# Altium PCB Power.PcbDoc
Units mil, origin at the board's own origin, x right, y up, seen from the top; angles counter-clockwise.
Board outline 1171.26 x 3031.5 mil, 2 copper layers (Top Layer, Bottom Layer); 73 components, 43 nets, 210 pads, 41 vias.
Unrouted connection lines stored in the file: 33.
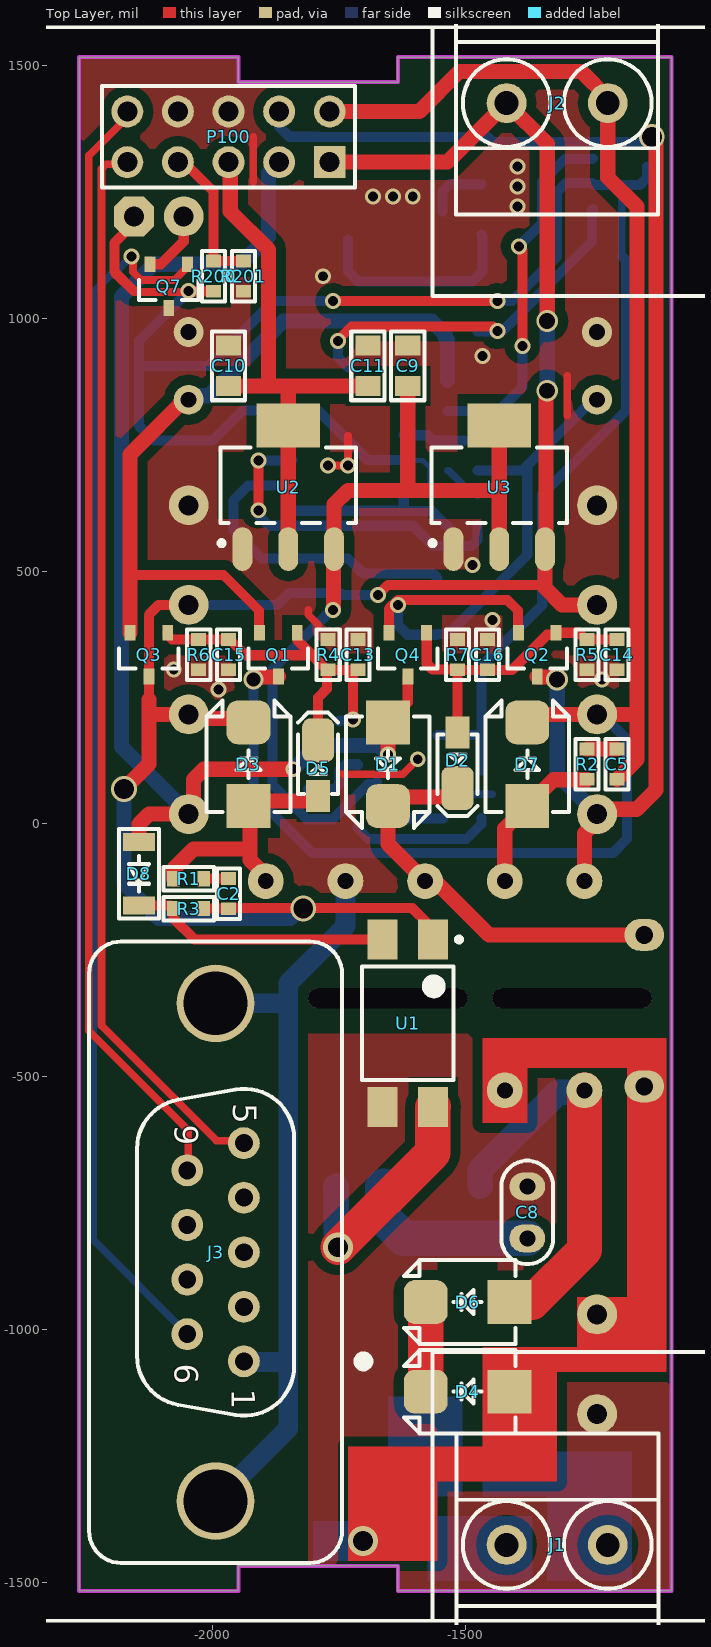
[diagram p0: Top Layer view]
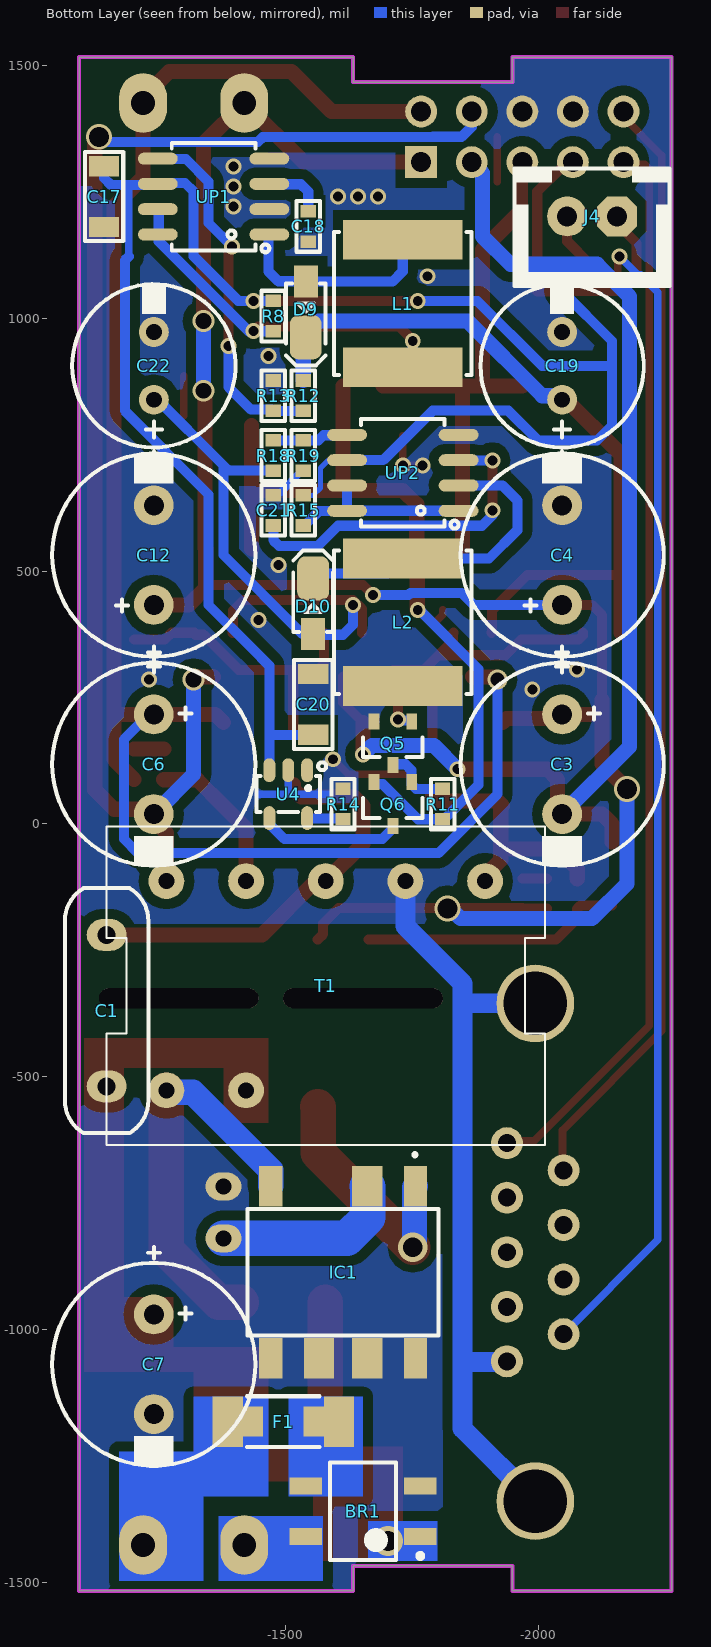
[diagram p1: Bottom Layer view, seen from below]
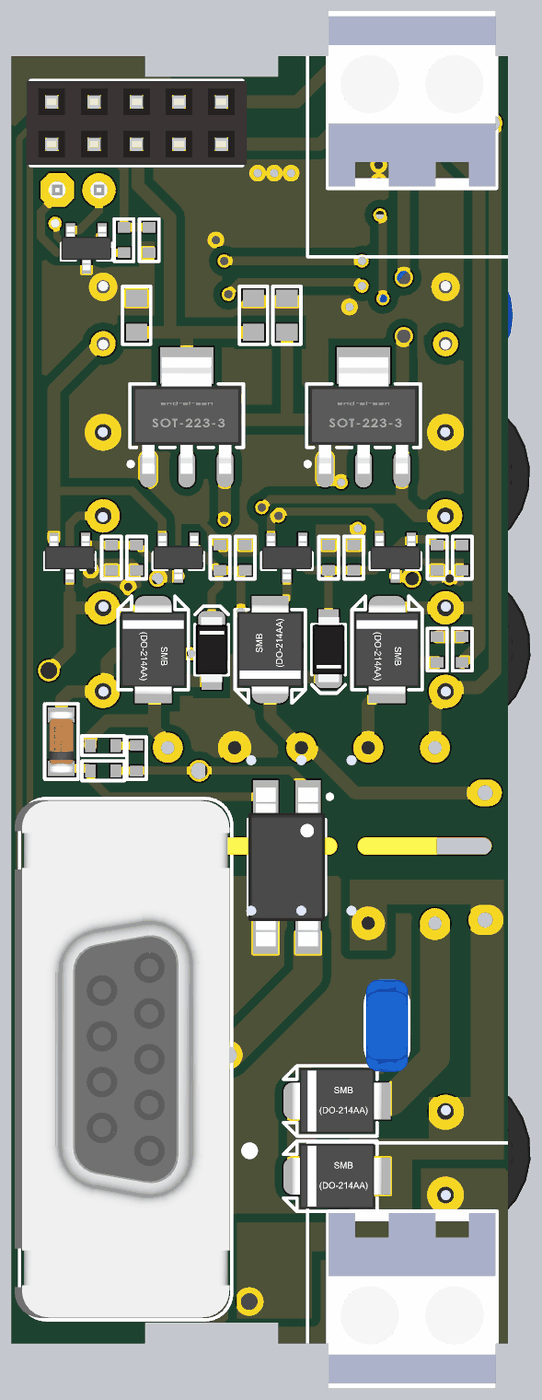
[diagram p2: 3D render of the assembled board from above, using the file's embedded part models]
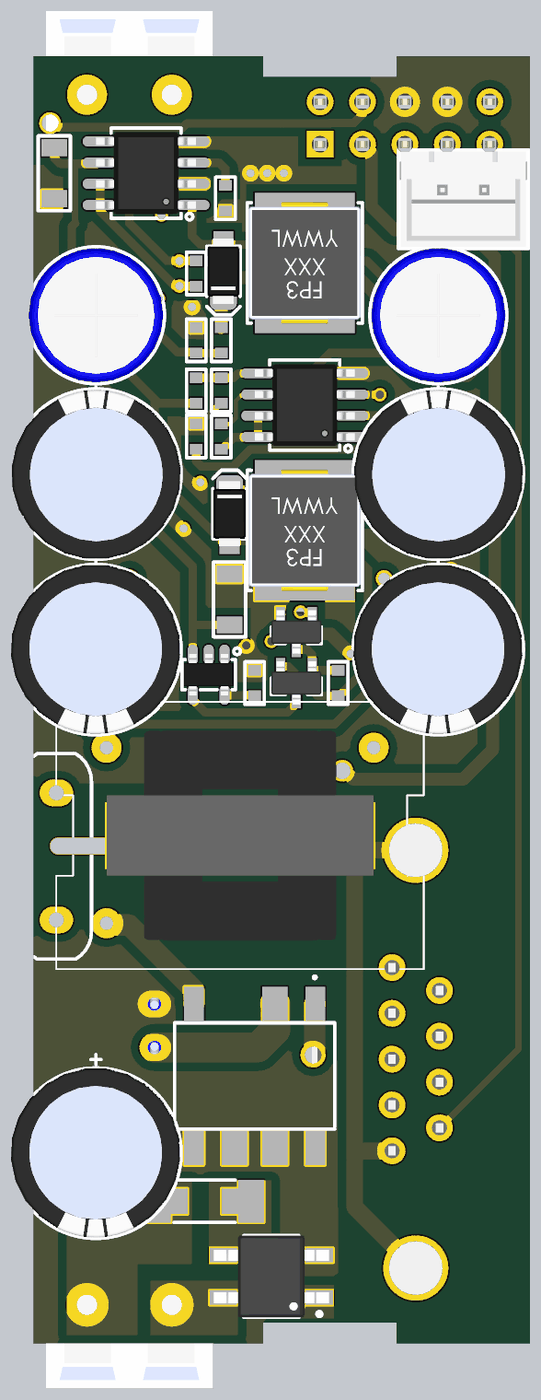
[diagram p3: 3D render of the assembled board from below, using the file's embedded part models]

## Layer stack, top to bottom
Top Solder: solder mask 0.4, Solder Resist, Dk 3.5
Top Layer: signal copper 1.4
Dielectric 1: dielectric 12.6, FR-4, Dk 4.8
Bottom Layer: signal copper 1.4
Bottom Solder: solder mask 0.4, Solder Resist, Dk 3.5

## Board outline
-2263.78,-1515.75 -2263.78,1515.75 -1948.82,1515.75 -1948.82,1466.54 -1633.86,1466.54 -1633.86,1515.75 -1092.52,1515.75 -1092.52,-1515.75 -1633.86,-1515.75 -1633.86,-1466.54 -1948.82,-1466.54 -1948.82,-1515.75

## Design rules (kind name [scope] priority, off if disabled: settings)
Clearance [All] p1: gap=7.87 ignorepadtopadclearanceinfootprint=FALSE except(20: Arc-Poly Track-Poly SMDPad-Poly THPad-Poly Via-Poly Fill-Poly Poly-Poly)
DiffPairsRouting [All] p1: maxlimit=10 minlimit=10 mostfreqgap=10 toplayer_minwidth=15 toplayer_maxwidth=15 toplayer_prefwidth=15 bottomlayer_minwidth=15 bottomlayer_maxwidth=15 bottomlayer_prefwidth=15 maxuncoupledlength=500
PolygonConnect [All] p1: connectstyle=Direct reliefconductorwidth=10 reliefentries=4 polygonreliefangle="90 Angle" airgapwidth=10
RoutingVias [All] p1: holewidth=28 width=50 viastyle="Through Hole" minholewidth=28 minwidth=50 maxholewidth=28 maxwidth=50
SolderMaskExpansion [All] p1: expansion=4
Width [All] p1: maxlimit=100 minlimit=10 preferedwidth=20
29 further rules are at their usual default settings.

## Classes and differential pairs
component class battery: C17 C18 C19 C20 C21 C22 D9 D10 J4 L1 L2 Q5 Q6 Q7 R8 R11 R12 R13 R14 R15 R18 R19 R200 R201 U4 UP1 UP2
component class Power: BR1 C1 C2 C3 C4 C5 C6 C7 C8 C9 C10 C11 C12 C13 C14 C15 C16 D1 D2 D3 D4 D5 D6 D7 D8 F1 IC1 IC2 J1 J2 J3 P100 Q1 Q2 Q3 Q4 R1 R2 R3 R4 R5 R6 R7 T1 U1 U2 U3
differential pair RS485: +RS485_P -RS485_N

## Components (designator, comment, footprint, x,y, rotation, side; value= is the part's Value field where it differs from the comment)
BR1 "Bridge" SOP254P690X270-4L -1653.54,-1358.27 r0 bottom
C1 "68pF" C_CER_D12 -1146.85,-368.9 r90 bottom
C2 "560pF" "CAP 0603 560p" -1968.5,-137.8 r270 top
C3 "1000uF" C_EL_10X12 -2047.24,118.11 r270 bottom
C4 "1000uF" C_EL_10X12 -2047.24,531.5 r90 bottom
C5 "560pF" "CAP 0603 560p" -1200.79,118.11 r270 top
C6 "1000uF" C_EL_10X12 -1240.16,118.11 r270 bottom
C7 "10uF" C_EL_10X12 -1240.16,-1067.9 r270 bottom
C8 "10uF" C_CER_M5 -1377.95,-767.72 r90 top
C9 "10uF" "CAP 0805 10u" -1614.17,905.51 r90 top
C10 "10uF" "CAP 0805 10u" -1968.5,905.51 r90 top
C11 "10uF" "CAP 0805 10u" -1692.91,905.51 r90 top
C12 "1000uF" C_EL_10X12 -1240.16,531.5 r90 bottom
C13 "100nF" "CAP 0603 100n" -1712.6,334.65 r90 top
C14 "100nF" "CAP 0603 100n" -1200.79,334.65 r270 top
C15 "100nF" "CAP 0603 100n" -1968.5,334.65 r270 top
C16 "100nF" "CAP 0603 100n" -1456.69,334.65 r90 top
C17 "100uF" "CAP 1206 100u" -1141.73,1240.16 r270 bottom
C18 "33pF" "CAP 0603 33p" -1545.28,1181.1 r270 bottom
C19 "150uF" C_EL_8X12 -2047.24,905.51 r90 bottom
C20 "100uF" "CAP 1206 100u" -1555.12,236.22 r90 bottom
C21 "33pF" "CAP 0603 33p" -1476.38,620.08 r90 bottom
C22 "150uF" C_EL_8X12 -1240.16,905.51 r90 bottom
D1 "SS34" D_SMB -1653.54,118.11 r270 top
D2 "SS34" d_sod123w -1515.75,118.11 r270 top
D3 "SS34" D_SMB -1929.13,118.11 r90 top
D4 "ZENER130V" D_SMB -1496.06,-1122.05 r180 top
D5 "SS34" D_SOD123W -1791.34,118.11 r90 top
D6 "1N4007" D_SMB -1496.06,-944.88 r180 top
D7 "SS34" D_SMB -1377.95,118.11 r90 top
D8 "Zener5.1V" DIOMELF3515L -2145.67,-98.43 r90 top
D9 "1N5819" D_SOD123W -1540.55,1009.05 r270 bottom
D10 "1N5819" D_SOD123W -1555.12,438.23 r90 bottom
F1 "Fuse" "Fuse 2410" -1496.06,-1181.1 r180 bottom
IC1 "TNY276GN" SMD-8C -1614.17,-885.83 r0 bottom
J1 "CONN_TB2" TBG_2 -1318.9,-1425 r180 top locked
J2 "CONN_TB2" TBG_2 -1318.9,1425 r0 top locked
J3 "D-Sub 9F" FCI_D09S24A4GV00LF -1994.09,-846.46 r270 top locked
J4 "HHDR_2" XH_2 -2106.3,1200.79 r0 bottom
L1 "10uH" L_7 -1732.28,1028.74 r90 bottom
L2 "10uH" L_7 -1732.28,398.82 r90 bottom
P100 "Header 2X5" "HDR 2X5 F ST 2.54" -1968.5,1358.27 r180 top
Q1 "MOSFET P" SOT23 -1870.08,334.65 r270 top
Q2 "MOSFET N" SOT23 -1358.27,334.65 r270 top
Q3 "MOSFET P" SOT23 -2125.98,334.65 r270 top
Q4 "MOSFET N" SOT23 -1614.17,334.65 r270 top
Q5 "MOSFET N" SOT23 -1712.6,159.65 r270 bottom
Q6 "MOSFET P" SOT23 -1712.6,39.37 r270 bottom
Q7 "MOSFET N" SOT23 -2086.61,1062.99 r270 top
R1 "18Ω" "RES 0603 18" -2047.24,-108.27 r0 top
R2 "18Ω" "RES 0603 18" -1259.84,118.11 r90 top
R3 "100Ω" "RES 0603 100" -2047.24,-167.32 r0 top
R4 "1KΩ" "RES 0603 1K" -1771.65,334.65 r90 top
R5 "1KΩ" "RES 0603 1K" -1259.84,334.65 r270 top
R6 "1KΩ" "RES 0603 1K" -2027.56,334.65 r270 top
R7 "1KΩ" "RES 0603 1K" -1515.75,334.65 r90 top
R8 "0Ω" "RES 0603 0" -1476.38,1003.94 r90 bottom
R11 "10KΩ" "RES 0603 10K" -1811.02,39.37 r90 bottom
R12 "1KΩ" "RES 0603 1K" -1535.43,846.46 r90 bottom
R13 "9.1KΩ" "RES 0603" -1476.38,846.46 r90 bottom
R14 "1.5KΩ" "RES 0603 1.5K" -1614.17,39.37 r270 bottom
R15 "0Ω" "RES 0603 0" -1535.43,620.08 r90 bottom
R18 "1KΩ" "RES 0603 1K" -1476.38,728.35 r270 bottom
R19 "9.1KΩ" "RES 0603" -1535.43,728.35 r270 bottom
R200 "10KΩ" "RES 0603 10K" -1998.03,1082.68 r90 top
R201 "10KΩ" "RES 0603 10K" -1938.97,1082.68 r270 top
T1 "Transformer 5+5" "EE19 5+5" -1579.92,-319.69 r0 bottom
U1 "PC817" PC817 -1614.17,-393.7 r270 top
U2 "AMS1117" SOT223_4 -1850.39,669.29 r90 top
U3 "AMS1117" SOT223_4 -1433.41,669.29 r90 top
U4 "LTC4054" SOT23_5 -1505.91,59.06 r270 bottom
UP1 "MC34063" SO_8 -1358.27,1240.16 r0 bottom
UP2 "MC34063" SO_8 -1732.28,694.09 r0 bottom

## Footprints (in the part's own frame and the unit in brackets; to place one, negate y for a bottom-side part, rotate by r counter-clockwise, add the part's x,y. Pads: shape width x height; smd on the part's side, far side on the other; paste and mask are expansions set on the pad)
C_CER_D12 [mm] "CAP, CER MULTILAYER, 12X4mm, pitch: 7.5mm"
  oval 1.6x2 hole 0.9: 1(-3.8,0) 2(3.8,0)
  silkscreen extent -6.15,-2.1 6.15,2.1, body extent -6,-2 6,2, height 16
C_CER_M5 [mm] "CAP, CER MULTILAYER, 5.0X2.5mm, pitch: 2.5mm, RAD0.1"
  oval 1.4x1.8 hole 0.8: 1(-1.3,0) 2(1.3,0)
  silkscreen extent -2.6,-1.3 2.6,1.3, body extent -2.75,-1.25 2.75,1.25, height 5.5
C_EL_8X12 [mm] "Cap Elec, D8.0X12.0H pitch: 3.5mm, RB.14/.26, RB.15/.32"
  round 1.5 hole 0.8: 1(-1.7,0) 2(1.7,0)
  silkscreen extent -5.1,-4.1 4.1,4.1, body extent -4.03,-4.03 4.03,4.03, height 2.98
C_EL_10X12 [mm] "Cap Elec, D10.0X12.0H pitch: 5.0mm"
  round 2 hole 1: 1(-2.5,0) 2(2.5,0)
  silkscreen extent -5.9,-5.1 5.1,5.1, body extent -5.11,-5.1 5.05,5.06, height 13.7
"CAP 0603 33p" [mil]
  rect 25x30 smd: 1(-30,0) 2(30,0)
  silkscreen extent -50,-23 50,23, body extent -30,-15 30,15, height 18
"CAP 0603 100n" [mil]
  rect 25x30 smd: 1(-30,0) 2(30,0)
  silkscreen extent -50,-23 50,23, body extent -30,-15 30,15, height 18
"CAP 0603 560p" [mil]
  rect 25x30 smd: 1(-30,0) 2(30,0)
  silkscreen extent -50,-23 50,23, body extent -30,-15 30,15, height 18
"CAP 0805 10u" [mil]
  rect 40x50 smd: 1(-40,0) 2(40,0)
  silkscreen extent -68,-33 68,33, body extent -40,-25 40,25, height 18
"CAP 1206 100u" [mil]
  rect 40x60 smd: 1(-60,0) 2(60,0)
  silkscreen extent -88,-38 88,38, body extent -60,-30 60,30, height 22
D_SMB [mm] "SMB Molded Diode, 2-Leads, Body 4.3x3.5mm"
  rect 2.2x2.2 smd: 1(-2.1,0)
  rrect50% 2.2x2.2 smd: 2(2.1,0)
  Top Layer pour cut-out: -1.524,2.1 -1.524,-2.1 1.524,-2.1 1.524,2.1
  silkscreen extent -2.4,-2.1 3.2,2.1, body extent -2.75,-1.95 2.75,1.95, height 2.45
d_sod123w [mm] "PowerDI-123, SOD123, DO-213AA, 1206D"
  rect 1.6x1.2 smd mask+0.1: 1(-1.6,0)
  rrect50% 2.2x1.6 smd mask+0.1: 2(1.2,0)
  Top Layer pour cut-out: -1.016,1.1 -1.016,-1.1 1.016,-1.1 1.016,1.1
  silkscreen extent -1.5,-1 2.6,1, body extent -1.95,-0.97 1.95,0.96, height 1
D_SOD123W [mm] "PowerDI-123, SOD123, DO-213AA, 1206D"
  rect 1.6x1.2 smd mask+0.1: 1(-1.6,0)
  rrect50% 2.2x1.6 smd mask+0.1: 2(1.2,0)
  Top Layer pour cut-out: -1.016,1.1 -1.016,-1.1 1.016,-1.1 1.016,1.1
  silkscreen extent -1.5,-1 2.6,1, body extent -1.95,-0.97 1.95,0.96, height 1
DIOMELF3515L [mm] "MELF Diode, 2-Leads, Body 3.50x1.50mm, IPC High Density"
  rect 0.9x1.6 smd: 1(-1.6,0) 2(1.6,0)
  silkscreen extent -2.25,-1 2.25,1, body extent -1.88,-0.8 1.82,0.8, height 1.6
"EE19 5+5" [mm]
  round 1.8 hole 0.8: 1(-8,-5.25) 2(-4,-5.25) 3(0,-5.25) 4(4,-5.25) 5(8,-5.25) 6(8,5.25) 7(4,5.25)
  round 0.5 hole 0.4: 8(4,5.25) 9(4,5.25) 10(4,5.25)
  silkscreen extent -11,-8 11,8, body extent -8.1,-6.3 8.1,6.3, height 14.75
FCI_D09S24A4GV00LF [mm] "Straight D-SUB 9 Female Contacts for PCB  with Harpoons and Female Screwlock (UNC4-40) and Elec. Continuity"
  round 1.6 hole 0.9: 1(5.48,1.42) 2(2.74,1.42) 3(0,1.42) 4(-2.74,1.42) 5(-5.48,1.42) 6(4.11,-1.42) 7(1.37,-1.42) 8(-1.37,-1.42) 9(-4.11,-1.42)
  round 3.9 hole 3.2: 10(-12.495,0) 11(12.495,0)
  silkscreen extent -15.6,-6.35 15.6,7.67, body extent -15.49,-6.65 15.5,6.21, height 12.1
"Fuse 2410" [mil]
  rect 60x100 smd: 1(-110,0) 2(110,0)
  rect 40x60 smd: 1(-60,0) 2(60,0)
  silkscreen extent -72,-50 72,50, body extent -120,-50 120,50, height 22
"HDR 2X5 F ST 2.54" [mm]
  rect 1.6x1.6 hole 1: 1(-5.08,1.27)
  round 1.6 hole 1: 2(-5.08,-1.27) 3(-2.54,1.27) 4(-2.54,-1.27) 5(0,1.27) 6(0,-1.27) 7(2.54,1.27) 8(2.54,-1.27) 9(5.08,1.27) 10(5.08,-1.27)
  silkscreen extent -6.35,-2.54 6.35,2.54, body extent -6.6,-2.5 6.6,2.5, height 8.5
L_7 [mm] "INDUCTOR, 7.2X6.9mm, 7.1X6.5mm, SPM6530"
  rect 2x6 smd: 1(-3.2,0) 2(3.2,0)
  silkscreen extent -3.6,-3.45 3.6,3.45, body extent -3.62,-3.35 3.63,3.35, height 3
PC817 [mm] "SOP, 4-Leads, Body 4.58x6.50mm, Pitch 2.54mm, IPC Medium Density"
  rect 2x1.5 smd: 1(-4.2,1.27) 2(-4.2,-1.27) 3(4.2,-1.27) 4(4.2,1.27)
  silkscreen extent -4.32,-2.3 2.85,2.7, body extent -4.75,-2.3 4.75,2.3, height 3.5
"RES 0603" [mil]
  rect 25x30 smd: 1(-30,0) 2(30,0)
  silkscreen extent -50,-23 50,23, body extent -30,-15 30,15, height 18
"RES 0603 0" [mil]
  rect 25x30 smd: 1(-30,0) 2(30,0)
  silkscreen extent -50,-23 50,23, body extent -30,-15 30,15, height 18
"RES 0603 1.5K" [mil]
  rect 25x30 smd: 1(-30,0) 2(30,0)
  silkscreen extent -50,-23 50,23, body extent -30,-15 30,15, height 18
"RES 0603 1K" [mil]
  rect 25x30 smd: 1(-30,0) 2(30,0)
  silkscreen extent -50,-23 50,23, body extent -30,-15 30,15, height 18
"RES 0603 10K" [mil]
  rect 25x30 smd: 1(-30,0) 2(30,0)
  silkscreen extent -50,-23 50,23, body extent -30,-15 30,15, height 18
"RES 0603 18" [mil]
  rect 25x30 smd: 1(-30,0) 2(30,0)
  silkscreen extent -50,-23 50,23, body extent -30,-15 30,15, height 18
"RES 0603 100" [mil]
  rect 25x30 smd: 1(-30,0) 2(30,0)
  silkscreen extent -50,-23 50,23, body extent -30,-15 30,15, height 18
SMD-8C [mil]
  rect 46x80 smd: 1(-143,-170) 4(143,-170) 5(143,170) 8(-143,170)
  rect 60x80 smd: 2(-47.67,-170) 6(47.67,170) 7(-47.67,170)
  silkscreen extent -189,-235 189,125
SO_8 [mm] "SOP-8, 5x3.9mm body 1.27mm pitch, SOT96-1, M08A, S8, SOIC8, VO8, MS-012AA(JEDEC), R-8, 8S2, VOG8"
  oval 2x0.6 smd: 1(-2.8,1.905) 2(-2.8,0.635) 3(-2.8,-0.635) 4(-2.8,-1.905) 5(2.8,-1.905) 6(2.8,-0.635) 7(2.8,0.635) 8(2.8,1.905)
  silkscreen extent -2.8,-2.7 2.1,2.8, body extent -3,-2.45 3,2.45, height 1.7
SOP254P690X270-4L [mm] "SOP, 4-Leads, Body 4.70x3.80mm, Pitch 2.54mm, IPC High Density"
  rect 1.65x0.85 smd: 1(-2.875,1.27) 2(-2.875,-1.27) 3(2.875,-1.27) 4(2.875,1.27)
  silkscreen extent -3,-2.45 1.65,2.45, body extent -3.45,-2.45 3.45,2.45, height 2.7
SOT23 [mm] "SOT23, 3-Leads, Body 2.90x2.45mm, Pitch 0.95mm, IPC High Density"
  rect 0.8x0.55 smd: 1(-1.1,0.95) 2(-1.1,-0.95) 3(1.1,0)
  silkscreen extent -0.3,-1.5 0.7,1.5, body extent -1.3,-1.5 1.3,1.5, height 1.1
SOT23_5 [mm] "SOT-23-5, SOT25, SOT-25, DBV(R-PDSO-G5), SOT753, TSOT23-5, SC-74A, SOT23-5, S5-T (LINEAR), MO-178AA, MO-193AB(JEDEC), MF05A (NS), TSOP-5(ON), UJ-5 (AD), 0.95mm pitch 3X1.5mm"
  oval 1.2x0.6 smd: 1(-1.2,0.95) 2(-1.2,0) 3(-1.2,-0.95) 4(1.2,-0.95) 5(1.2,0.95)
  silkscreen extent -1.6,-1.6 0.9,1.9, body extent -1.25,-1.5 1.25,1.5, height 1.15
SOT223_4 [mm] "SOT223, 4-Leads, Body 6.5x3.5mm, Pitch 2.30mm"
  oval 2.2x1 smd: 1(-3.2,2.3) 2(-3.2,0) 3(-3.2,-2.3)
  rect 2.2x3.2 smd: 4(3,0)
  Top Layer pour cut-out: -1.7,3.556 1.7,3.556 1.7,-3.556 -1.7,-3.556
  silkscreen extent -3.02,-3.4 1.9,3.47, body extent -3.5,-3.25 3.5,3.25, height 1.7
TBG_2 [mm] "Terminal Block Green"
  round 2 / inner round 2 / far side oval 2.4x3 hole 1.2: 1(-2.54,0) 2(2.54,0)
  silkscreen extent -5.08,-5.6 5.05,5.08, body extent -5,-5.5 5,5, height 14
XH_2 [mm] "PW10-xx-M, JST-BxB-XH-A pitch: 2.5mm"
  oct 2x2 hole 1: 1(-1.25,0)
  round 2 hole 1: 2(1.25,0)
  silkscreen extent -3.9,-2.4 3.9,3.5, body extent -3.75,-2.3 3.75,3.4, height 7

## Part data
C1: library part CCR_68PF_760VAC_10%_VISHAY_VY1, "Non-polarised capacitor", Case="LS10 D8 x W5 x H12", Manufacturer="VISHAY BCCOMPONENTS", Manufacturer Part Number=VY1680K31Y5SQ6UV0, Tolerance=±10%, Voltage=760VAC, Author="CERN DEM JLC", ComponentHeight=12mm, Component Type=Standard, CreateDate=5/27/2013, HelpURL=\\cern.ch\dfs\Applications\Altium\Datasheets\CCR_VISHAY_VY1.pdf, LatestRevisionDate=5/27/2013, Mounted=Yes, Part Description="AC Line Rated Disc Capacitor (Y5S, Class X1)", Part Number=CCR_68PF_760VAC_10%_VISHAY_VY1, Pin Count=2, Sense=No, SMD=No, Socket=No, Status=None
C2 C5: library part "CAP 560pF"
C3 C4 C6 C12: library part CAP_THD_EL_10u25V, "CAP, THD, ELEC, 10uF, 25V", =http://www.chila.ir, MANF=MANF, MANF_P#=MANF_PART#, PARAM=25V, PARAM2=PARAM2
C7 C8 C9 C10 C11: library part "CAP 10uF"
C13 C14 C15 C16: library part "CAP 100nF"
C17 C20: library part "CAP 100uF"
C18 C21: library part "CAP 33pF"
C19 C22: library part CAP_THD_EL, "CAP, THD, ELEC,", =http://www.chila.ir, ASSEMBLY=ASSEMBLY, DESC=DESCRIPTION, DIST#=MOUSER, MANF=MANF, MANF_P#=MANF_PART#, PARAM=25V, PARAM2=20%, PRICE="10= 5$"
D1 D2 D3 D5 D7: library part DIODE_SMD_SCHOTTKY_SS34, "DIODE, SCHOTTKY, 20V, 3A", =http://www.chila.ir, ASSEMBLY=ASSEMBLY, DESC=DESCRIPTION, MANF=VISHAY, MANF_P#=SS34, PARAM=20V, PARAM2=3A, PRICE=PRICE
D4: library part DIODE_THD_ZENER_1W, "DIODE, ZENER, 1W", =http://www.chila.ir, ASSEMBLY=ASSEMBLY, DESC=DESCRIPTION, MANF=Diodes, MANF_P#=ZENER15V, PARAM=15V, PARAM2=0.2W, PRICE=PRICE
D6: library part DIODE_THD_1N4007, "DIODE, GENERAL PURPOSE, 1000V/1A", =http://www.chila.ir, ASSEMBLY=ASSEMBLY, DESC=DESCRIPTION, MANF=Diodes, MANF_P#=1N4007, PARAM="1000V, 1.15V", PARAM2=1.5A, PRICE=PRICE
D8: library part Diode
D9 D10: library part DIODE_SMD_SCHOTTKY_1N5819, "DIODE, SCHOTTKY, 40V, 1A", =http://www.chila.ir, ASSEMBLY=ASSEMBLY, DESC=DESCRIPTION, MANF=DIODES, MANF_P#=1N5819HW-7-F, PARAM=40V, PARAM2=1A, PRICE=PRICE
IC1: "Integrated Circuit", Manufacturer_Name="Power Integrations", Mouser Part Number=869-TNY276GN, RS Part Number=0533737, Datasheet Link=https://www.power.com/sites/default/files/product-docs/tny274-280.pdf, Manufacturer_Part_Number=TNY276GN, Mouser Price/Stock=https://www.mouser.co.uk/ProductDetail/Power-Integrations/TNY276GN?qs=WS5Jv%252B%252Bx1qUyDN8fA3lScQ%3D%3D, RS Price/Stock=http://uk.rs-online.com/web/p/products/0533737
J1 J2: "CONN, TERMINAL BLOCK, 5.08mm pitch", =http://www.chila.ir
J3: library part FCI_D09S24A4GV00LF, "Connector D-sub 9 Female", Manufacturer=FCI, Manufacturer Part Number=D09S24A4GV00LF, Author="CERN DEM JMW", ComponentHeight=12.39mm, Component Type=Standard, CreateDate=06/06/2008, Family="D-Sub 9F", HelpURL=\\cern.ch\dfs\Applications\Altium\Datasheets\FCI_D09S24A4GV00LF.pdf, LatestRevisionDate=06/06/2008, Mounted=Yes, Part Description="Straight D-SUB 9 Female Contacts for PCB  with Harpoons and Female Screwlock (UNC4-40) and Elec. Continuity", Part Number=FCI_D09S24A4GV00LF, Pin Count=11, PressFit=No, Sense=No, SMD=No, Socket=No, Status=None
J4: library part XH_2, "JST-XH pitch: 2.5mm", =http://www.chila.ir
L1 L2: library part IND_SMD_10uH_2A, "INDUCTOR, 10uH 2A, 38mOhm, 2626", =http://www.chila.ir, ASSEMBLY=ASSEMBLY, DESC="INDUCTOR, 10uH 2A, 38mOhm, 2626", MANF=Bourns, MANF_P#=SRR6038-100Y, PARAM="2A Irms, 2.05A Isat", PARAM2=38mOhm, PRICE=2.5$
R1 R2: library part "RES 18"
R3: library part "RES 100"
R4 R5 R6 R7 R12 R18: library part "RES 1K"
R8 R15: library part "RES 0"
R11 R200 R201: library part "RES 10K"
R13 R19: library part RES
R14: library part "RES 1.5K"
U2 U3: library part VREG_1117_SOT223, "REG, Linear, LDO1V, 0.8A, SOT-223", =http://www.chila.ir, MANF="TI, ON, ST", MANF_P#="LD1117, LM1117, AMS1117, TLV1117, REG1117, NCP1117, LT1117, SPX1117", PARAM="LDO1V, 0.8A", PARAM2=1.2/1.5/1.8/2.5/2.85/3.3/5V
U4: library part LTC4054_SOT23-5, "PWR, CHARGER, Linear, Li-Ion, 0.8A, 4.2v", =http://www.chila.ir, MANF="ANALOG DEVICE/LINEAR", MANF_P#=LTC4054ES5-4.2, PARAM="Li-Ion, 0.8A, 4.2v", PARAM2="4.2~6.5Vcc, -40~85oC", PRICE=5t@JAVAN
UP1 UP2: library part VREG_MC34063, "REG, Switching, Buck/Boost/Inv, 1.5A, ADJ, 100KHz,3~40VIN, SO-8", =http://www.chila.ir, ASSEMBLY=ASSEMBLY, DESC="REG, Switching, Buck/Boost/Inv, 1.5A, ADJ, 100KHz,3~40VIN, SO-8", MANF="TI, ON, HTC", MANF_P#="MC34063AD, HTC34063", PARAM="1.5A, ADJ", PARAM2=100KHz,3~40VIN, PRICE=600t@PAYA

## Free pads (board coordinates)
  rrect100% 314.96x39.37 hole 39.37 slot 314.96 at 0 deg: H(-1653.54,-344.49) H(-1289.37,-344.49)

## Via types
v1: diameter 31.5, hole 19.68, Top Layer to Bottom Layer, 32 vias
v2: diameter 51.18, hole 39.37, Top Layer to Bottom Layer, 3 vias
v3: diameter 43.31, hole 31.5, Top Layer to Bottom Layer, 3 vias
v4: diameter 59.06, hole 39.37, Top Layer to Bottom Layer, 2 vias
v5: diameter 39.37, hole 27.56, Top Layer to Bottom Layer, 1 vias

## Nets (pads, with @x,y where several pads share a name; then routed paths per layer and width w, separated by ;. In a path a pad name is that pad's centre, name@x,y a point inside that pad or via, vN(x,y) a via of type N, cw(c..) or ccw(c..) an arc to the next point about the centre after c; other vN are vias at no path point)
+3.3: C10.1 C11.1 P100.5 U2.2 U2.4 | length 1073.2
  Top Layer w30: C10.1 -1889.76,865.51 ; P100.5 -1965.16,1304.92 -1965.16,1210.63 -1889.76,1135.24 -1889.76,865.51 ; U2.2 U2.4 -1850.39,865.51 ; C11.1 -1850.39,865.51 ; -1889.76,865.51 -1850.39,865.51
+5V: C9.1 Q6.2 R11.1 U2.3 U3.2 U3.4 | length 1661.4
  Top Layer w20: v1(-1761.81,423.23) v1@-1760.83,424.21 ; U2.3@-1760.83,542.32 U2.3
  Top Layer w30: v1@-1760.83,424.21 U2.3@-1760.83,542.32 ; U2.3 -1759.84,631.89 -1732.28,659.45 -1614.17,659.45 ; C9.1 -1614.17,659.45 ; U3.2 -1433.41,659.45 ; U3.4 -1433.41,659.45 ; -1614.17,659.45 -1433.41,659.45
  Bottom Layer w20: v1(-1761.81,423.23) -1764.65,423.23 -1881.73,306.14 -1881.73,77.58 -1813.52,9.37 R11.1 -1762.28,9.37 -1692.91,78.74 -1676.02,78.74 -1675.2,79.57 Q6.2
+12_battery: C19.1 D9.2 Q1.2 Q3.2 R12.2 | length 1519.4
  Top Layer w20: -2165.35,492.13 -2163.39,492.13 -1978.35,492.13 -1908.31,422.09 -1908.31,378.78 Q1.2
  Top Layer w30: Q3.2 -2163.39,492.13 -2163.39,730.32 C19.1@-2047.24,846.46
  Bottom Layer w30: C19.1@-2047.24,846.46 -2007.87,846.46 -1860.24,994.09 -1566.83,994.09 -1540.55,967.81 D9.2 -1535.43,956.69 R12.2
+ISO: C5.2 C6.1 D7.2 J2.2 P100.2 Q1.3 | length 3566.7
  Top Layer w30: v5(-1919.29,285.43) -1914.13,290.59 -1870.83,290.59 Q1.3 ; P100.2 -1591.34,1408.27 -1512.36,1487.24 -1270.71,1487.24 -1218.9,1435.43 J2.2 -1218.9,1277.95 -1161.42,1220.47 -1161.42,216.54 ; D7.2 -1362.2,216.54 C6.1 -1161.42,216.54 ; C5.2 -1161.42,127.48 -1161.42,216.54
  Bottom Layer w20: v5(-1919.29,285.43) -1919.29,59.06 -1802.68,-57.56 -1209.13,-57.56 -1181.1,-29.53 -1181.1,167.32 -1230.32,216.54 C6.1
+VS: C2.2 C3.1 C4.1 C12.1 D3.2 J2.1 P100.1 Q3.3 R3.2 U1.1 U3.3 | length 3960.3
  Top Layer w20: -2125.98,246.06 Q3.3 -2125.98,413.39 -2106.3,433.07 C4.1 ; R3.2 -1968.98,-167.32 C2.2 ; C2.2@-1968.5,-166.3 -1605.35,-166.3 -1574.8,-196.85 -1574.8,-217.72 U1.1 ; v1(-1673.23,452.76) -1653.54,472.44 -1352.7,472.44 -1342.86,482.28
  Top Layer w30: v2(-2175.19,68.9) -2175.19,69.48 -2125.98,118.68 -2125.98,216.54 ; -2125.98,246.06 -2125.98,216.54 ; D3.2 -1937.01,208.66 -2039.37,208.66 C3.1 -2125.98,216.54 ; P100.1 -1535.63,1308.27 J2.1 -1338.58,1344.69 v3(-1338.58,994.09) ; v3(-1338.58,856.3) -1341.07,853.81 -1341.07,545.1 U3.3 -1342.86,482.28 -1342.86,466.88 -1309.06,433.07 C12.1
  Bottom Layer w20: C4.1 -1871.97,433.07 -1848.19,456.85 -1747.88,456.85 -1743.79,452.76 v1(-1673.23,452.76)
  Bottom Layer w30: v2(-2175.19,68.9) -2175.19,-118.11 -2106.3,-187.01 -1846.28,-187.01 -1826.6,-167.32 v2(-1820.87,-167.32) ; v3(-1338.58,856.3) v3(-1338.58,994.09)
+VSt: C13.1 C15.1 D5.2 Q1.1 Q3.1 Q5.1 R4.1 R6.1 | length 743.1
  Top Layer w20: Q3.1 -2088.58,373.03 -2080.2,364.65 R6.1 C15.1 -1966,364.65 -1934.85,333.49 -1803,333.49 ; Q1.1 -1831.85,377.13 -1831.85,362.34 -1803,333.49 ; D5.2 -1791.34,250.2 -1774.15,267.38 R4.1@-1774.15,304.65 ; v1(-1722.44,206.69) -1722.44,294.8 -1717.6,299.65 -1717.6,302.15 C13.1@-1715.1,304.65 ; C13.1 C13.1@-1715.1,304.65 ; -1803,333.49 R4.1@-1774.15,304.65 ; R4.1@-1774.15,304.65 R4.1 C13.1@-1715.1,304.65
  Bottom Layer w20: Q5.1 -1750,204 -1749.17,204.82 -1724.31,204.82 v1(-1722.44,206.69)
-12_battery: C22.1 D10.1 Q2.2 Q4.2 R18.2 | length 1206.2
  Top Layer w20: Q4.2 -1651.57,425.2 -1633.86,442.91 -1417.32,442.91 -1396.5,422.09 -1396.5,378.78 Q2.2
  Bottom Layer w20: v1(-1633.86,433.07) -1633.86,393.7 -1614.17,374.02 -1556.34,374.02 D10.1 -1534.21,375.24 -1377.95,531.5 -1377.95,708.66 ; R18.2 -1388.27,698.35 -1377.95,708.66 ; C22.1@-1240.16,846.46 -1377.95,708.66
-ISO: C6.2 P100.4 Q2.3 T1.5 | length 2697.2
  Top Layer w30: Q2.3 -1357.52,290.59 -1324.05,290.59 v3(-1318.9,285.43) ; T1.5 -1264.96,-18.31 -1240.16,6.5 C6.2 -1230.83,29.01 -1161.93,29.01 -1123.54,67.4 -1123.54,1349.92 v2(-1131.89,1358.26)
  Bottom Layer w20: P100.4 -1868.5,1378.21 -1848.56,1358.27 -1791.97,1358.27 -1791.34,1357.64 -1455.44,1357.64 -1445.87,1348.07 -1142.08,1348.07 v2(-1131.89,1358.26)
  Bottom Layer w30: v3(-1318.9,285.43) -1318.9,98.43 C6.2
-VS: C3.2 D1.1 D8.2 P100.3 Q4.3 | length 2376.7
  Top Layer w20: D1.1 -1614.17,240.16 Q4.3
  Top Layer w30: D8.2 -2145.67,0 -2125.98,19.68 C3.2 -2037.92,29.01 -2037.92,88.07 -2017.72,108.27 v1(-1840.55,108.27) ; v1(-1653.54,137.8) D1.1
  Bottom Layer w30: C3.2 -2180.28,152.72 -2180.28,1042.66 -2116.64,1106.3 -1944.88,1106.3 -1889.76,1161.42 -1889.76,1287.01 P100.3 ; v1(-1840.55,108.27) -1793.86,154.96 -1671.12,154.96 -1653.95,137.8 v1(-1653.54,137.8)
-VSt: C14.1 C16.1 D2.1 Q2.1 Q4.1 R5.1 R7.1 | length 603.3
  Top Layer w20: Q4.1 -1576.77,316.93 -1564.96,305.12 -1516.22,305.12 R7.1 ; D2.1 R7.1 ; C14.1 R5.1 -1262.34,364.65 -1275.65,377.95 Q2.1 -1320.87,374.84 -1321.69,374.02 -1338.58,374.02 -1407.95,304.65 C16.1 R7.1
battery_measurment: P100.7 R200.2 R201.1 | length 291
  Top Layer w20: P100.7 -2056.87,1308.27 -2022.59,1273.98 -2022.02,1273.98 -1998.03,1250 R200.2 R201.1
cpu_command: J3.6 Q7.1 | length 2404.3
  Top Layer w15: v1(-2160.47,1122.04) -2157.32,1118.89 -2157.32,1091.28 -2141.21,1075.18 -2075.41,1075.18 -2049.21,1101.38 Q7.1
  Bottom Layer w15: v1(-2160.47,1122.04) -2197.49,1085.03 -2202.36,1085.03 -2236.22,1051.17 -2236.22,1038.75 -2236.22,-822.05 J3.6
GND: C4.2 C9.2 C10.2 C11.2 C12.2 C13.2 C14.2 C15.2 C16.2 C17.2 C18.2 C19.2 C20.2 C21.2 C22.2 J3.1 J3.10 J3.11 L2.1 P100.6 P100.8 Q5.2 Q7.3 R4.2 R5.2 R6.2 R7.2 R13.2 R14.1 R19.2 R201.2 T1.2 U2.1 U3.1 U4.2 UP1.2 UP1.4 UP2.4 | length 2307
  Top Layer w15: -1919.29,1269.68 -1919.29,1358.27 ; -1811.02,423.23 -1811.02,413.39 -1791.34,393.7 ; v1(-1771.65,708.66) v1(-1732.28,708.66) -1732.28,767.72 ; -1742.13,98.43 -1624.02,98.43 v1(-1594.49,127.95) ; -1299.21,807.09 -1299.21,885.83
  Bottom Layer w15: -1584.65,59.06 -1505.91,59.06 ; R19.2 -1532.93,698.35 -1489.67,655.08 -1481.38,655.08 C21.2 ; U4.2 -1505.91,59.06 ; -1446.85,59.06 -1505.91,59.06
  Bottom Layer w39.37: J3.11 -1850.39,-1194.69 -1850.39,-1062.99 ; J3.10@-1978.15,-354.53 J3.10 -1993.9,-354.33 -1850.39,-354.33 ; J3.1 -1937.4,-1062.99 -1850.39,-1062.99 ; T1.2 -1737.4,-201.97 -1850.39,-314.96 -1850.39,-354.33 ; -1850.39,-1062.99 -1850.39,-354.33
  other v1: -1988.19,265.75 -1230.32,285.43 -2076.77,305.12 -1446.85,403.54 -1486.22,511.81 -1466.54,925.2 -1781.5,1082.68 -1397.64,1220.47 -1683.07,1240.16 -1643.7,1240.16 -1604.33,1240.16 -1397.64,1259.84 -1397.64,1299.21
GND-ISO: BR1.2 C7.2 C8.2 IC1.5 IC1.6 IC1.7 IC1.8 U1.3
NetBR1_1: BR1.1 C1.1 C7.1 D4.1 T1.7 T1.8 T1.9 T1.10
  other v4: -1702.76,-1417.32
NetBR1_3: BR1.3 F1.2
NetBR1_4: BR1.4 J1.2
NetC1_2: C1.2 D1.2 D2.2 T1.3 | length 816.5
  Top Layer w30: D2.2@-1515.75,78.11 D2.2 -1515.75,69.59 -1532.19,53.15 -1635.83,53.15 D1.2 -1653.54,-39.37 T1.3 -1560.24,-112.99 -1453.94,-219.29 C1.2
NetC2_1: C2.1 R1.2 | length 48.9
  Top Layer w20: R1.2 -2017.01,-108.03 -1968.74,-108.03 C2.1
NetC5_1: C5.1 R2.2 | length 59.1
  Top Layer w30: R2.2 C5.1
NetC8_1: C8.1 IC1.2 | length 364.9
  Bottom Layer w70: IC1.2 -1663.39,-717.37 -1663.39,-777.56 -1622.05,-818.9 C8.1
NetC17_1: C17.1 C20.1 J4.1 R8.2 R15.2 R200.1 U4.3 UP1.6 UP2.6 | length 4047.2
  Top Layer w16: -2155.51,1053.15 -2154.17,1051.8 -2048.59,1051.8 v1(-2047.24,1053.15)
  Top Layer w20: -2155.51,1053.15 -2194.09,1091.73 -2194.09,1148.38 -2155.51,1186.96 J4.1 ; v1(-2047.24,1053.15) -2047.01,1052.91 -1998.27,1052.91 R200.1 ; v1(-1761.81,1033.46) v1(-1437.01,1033.46)
  Bottom Layer w10: UP2.6 -1621.46,718.5 -1584.65,718.5 -1569.8,703.66 -1569.8,664.29 -1555.12,649.61 -1535.91,649.61 R15.2
  Bottom Layer w15: -1190.94,1122.05 -1190.94,1262.66
  Bottom Layer w20: v1(-2047.24,1053.15) -2145.67,954.72 -2145.67,905.51 ; v1(-1761.81,1033.46) -1879.92,1033.46 -2007.87,905.51 -2145.67,905.51 ; UP2.6 -1693.5,719.09 -1791.34,816.93 -1940.79,816.93 -1999.84,757.87 -2116.14,757.87 -2145.67,787.4 -2145.67,905.51 ; C20.1 -1469.45,176.22 -1468.5,177.17 ; R8.2 -1407.01,1033.94 -1318.9,1122.05 -1318.9,1250 -1301.93,1266.96 -1249.84,1266.96 UP1.6 -1245.53,1262.66 -1190.94,1262.66 -1155.95,1262.66 -1141.73,1276.87 C17.1@-1141.73,1299.21 ; U4.3 -1468.5,177.17 ; -1434.13,347.36 -1468.5,312.99 -1468.5,177.17 ; -1434.08,347.36 -1348.43,433.02 -1348.43,651.42 -1182.91,816.93 -1182.91,1114.02 -1190.94,1122.05
NetC18_1: C18.1 UP1.3 | length 121.9
  Bottom Layer w20: C18.1 -1545.28,1250 -1530.81,1264.46 -1469.2,1264.46 UP1.3
NetC21_1: C21.1 UP2.3 | length 667.7
  Top Layer w20: v1(-1909.45,620.08) v1(-1909.45,718.5)
  Bottom Layer w20: v1(-1909.45,620.08) -1909.45,610.24 -1888.62,589.41 -1604.33,589.41 -1564.23,549.31 -1488.09,549.31 -1476.38,561.02 C21.1 ; v1(-1909.45,718.5) -1909.15,718.8 -1842.82,718.8 UP2.3
NetD3_1: D3.1 D5.1 R1.1 T1.1 | length 496.3
  Top Layer w30: R1.1 -2077.24,-89.06 -2037.4,-49.21 -1925.94,-49.21 ; T1.1 -1894.88,-101.93 -1925.94,-70.87 -1925.94,-49.21 ; D5.1 -1791.34,53.9 -1799.96,45.28 -1919.29,45.28 D3.1 -1925.94,32.24 -1925.94,-49.21
NetD4_2: D4.2 D6.2 | length 177.2
  Top Layer w70: D4.2 D6.2
NetD6_1: D6.1 IC1.4 T1.6 | length 810
  Top Layer w70: D6.1 -1368.11,-944.88 -1264.96,-841.73 T1.6
  Bottom Layer w50: IC1.4 -1471.17,-683.77 -1317.77,-530.37 -1268.95,-530.37 T1.6
NetD7_1: D7.1 R2.1 T1.4 | length 306.8
  Top Layer w30: T1.4 -1422.44,-9.06 D7.1 -1325.96,87.43 -1260.52,87.43 R2.1
NetD8_1: D8.1 R3.1 U1.2 | length 520.5
  Top Layer w20: D8.1 -2083.15,-161.42 R3.1 -2076.77,-167.8 -2076.77,-187.01 -2035.43,-228.35 U1.2
NetD9_1: D9.1 L1.2 UP1.1 | length 418.5
  Bottom Layer w20: L1.2 -1732.28,1092.52 -1711.81,1072.05 D9.1 -1539.76,1072.83 -1486.22,1072.83 -1466.54,1092.52 -1466.54,1163.48 -1468.21,1165.16 UP1.1
NetD10_2: D10.2 L2.2 UP2.2 | length 630.5
  Bottom Layer w20: UP2.2 -1842.72,669.29 -1929.13,669.29 -1958.66,639.76 -1958.66,580.71 -1902.76,524.8 L2.2 -1702.91,495.43 -1565.08,495.43 D10.2
NetF1_1: F1.1 J1.1
NetIC1_1: IC1.1 U1.4 | length 478.3
  Top Layer w70: v4(-1751.97,-836.61) -1564.96,-649.61 -1564.96,-559.84 U1.4
  Bottom Layer w50: IC1.1 -1755.31,-717.69 -1755.31,-830.83 -1751.97,-834.16 v4(-1751.97,-836.61)
NetJ4_2: J4.2 Q7.2 | length 134.9
  Top Layer w20: Q7.2 -2102.36,1106.3 -2057.09,1151.57 J4.2
NetL1_1: L1.1 R8.1 UP1.7 UP1.8 | length 756.4
  Top Layer w20: v1(-1751.97,954.72) -1751.97,956.73 -1725.32,983.39 -1445.98,983.39 v1(-1437.01,974.41)
  Bottom Layer w20: v1(-1751.97,954.72) -1751.97,922.44 L1.1 ; R8.1 -1427.59,973.94 -1250,1151.53 -1250,1213.48 -1248.33,1215.16 UP1.7
NetQ5_3: Q5.3 Q6.1 R11.2 | length 136.2
  Bottom Layer w20: R11.2 -1758.39,69.37 -1750,77.76 Q6.1 -1749.17,83.5 -1749.17,106.39 -1737.46,118.11 -1713.43,118.11 -1712.6,117.28 Q5.3
NetQ6_3: Q6.3 U4.4 | length 281.7
  Bottom Layer w20: Q6.3 -1712.6,-8.86 -1691.77,-29.69 -1498.19,-29.69 -1468.5,0 U4.4
NetR12_1: R12.1 R13.1 UP1.5 | length 714.6
  Top Layer w20: v1(-1394.72,1141.73) -1387.8,1134.81 v1(-1387.8,944.88)
  Bottom Layer w20: R12.1 R13.1 -1473.88,818.96 -1432.24,818.96 -1387.8,863.4 v1(-1387.8,944.88) ; v1(-1394.72,1141.73) -1348.43,1188.02 -1348.43,1269.68 -1303.65,1314.46 -1248.72,1314.46 UP1.5
NetR14_2: R14.2 U4.5 | length 71.9
  Bottom Layer w20: R14.2 -1612.95,10.59 -1544.53,10.59 U4.5
NetR15_1: R15.1 UP2.1 UP2.7 UP2.8 | length 369.1
  Bottom Layer w20: UP2.1 UP2.8 ; UP2.7 UP2.8 ; R15.1 -1537.93,590.08 -1566.26,618.4 -1621.35,618.4 UP2.8
NetR18_1: R18.1 R19.1 UP2.5 | length 150.1
  Bottom Layer w20: UP2.5 -1621.35,768.4 -1575.49,768.4 -1565.43,758.35 R19.1 R18.1
RS485_N: J3.9 P100.10 | length 2206.6
  Top Layer w15: P100.10 -2168.5,1397.2 -2244.47,1321.24 -2244.47,-409 -2047.97,-605.49 -2047.97,-682.62 J3.9
RS485_P: J3.5 P100.9 | length 2127.7
  Top Layer w15: P100.9 -2172.69,1304.08 -2210.68,1304.08 -2219.47,1295.3 -2219.47,-398.64 -1992.19,-625.93 -1942.97,-625.93 J3.5
pads on no net: J3.2 J3.3 J3.4 J3.7 J3.8 U4.1

## Polygon pours and split planes (outlines as drawn)
GND on Top Layer "bottomLayer-GND" (solid, remove dead copper, pour order 20): -1092.52,-196.85 -2263.78,-196.85 -2263.78,1515.75 -1948.82,1515.75 -1948.82,1466.54 -1633.86,1466.54 -1633.86,1515.75 -1092.52,1515.75
GND-ISO on Top Layer "bottomLayer-GND_ISO" (solid, remove dead copper, pour order 16): -1092.52,-1515.75 -1092.52,-414.39 -1811.02,-414.39 -1811.02,-1466.54 -1635.15,-1466.54 -1635.15,-1515.75
GND on Bottom Layer "bottomLayer-GND" (solid, remove dead copper, pour order 24): -1092.52,-196.85 -2263.78,-196.85 -2263.78,1515.75 -1948.82,1515.75 -1948.82,1466.54 -1633.86,1466.54 -1633.86,1515.75 -1092.52,1515.75
GND-ISO on Bottom Layer "bottomLayer-GND_ISO" (solid, remove dead copper, pour order 18): -1092.52,-1515.75 -1092.52,-423.23 -1811.02,-423.23 -1811.02,-1466.54 -1633.86,-1466.54 -1633.86,-1515.75

## Keep-outs
Keep-Out Layer:
  the board outline again, w7.87

## Other copper
Top Layer:
  rectangle net NetBR1_1: -1466.54,-590.55 -1377.95,-433.07
  rectangle net NetBR1_1: -1466.54,-482.28 -1102.36,-423.23
  rectangle net NetBR1_1: -1181.1,-1013.78 -1102.36,-433.07
  rectangle net NetBR1_1: -1594.49,-1299.21 -1407.48,-1230.32
  rectangle net NetBR1_1: -1338.58,-1082.68 -1259.84,-1033.46
  rectangle net NetBR1_1: -1466.54,-1299.21 -1318.9,-1033.46
  rectangle net NetBR1_1: -1279.53,-1082.68 -1102.36,-935.04
  rectangle net NetBR1_1: -1732.28,-1456.69 -1555.12,-1230.32
Bottom Layer:
  rectangle net NetF1_1: -1338.58,-1496.06 -1171.26,-1240.16
  rectangle net NetF1_1: -1466.54,-1328.74 -1318.9,-1131.89
  rectangle net NetBR1_1: -1801.18,-1456.69 -1663.39,-1377.95
  rectangle net NetBR1_3: -1653.54,-1328.74 -1505.91,-1131.89
  rectangle net NetBR1_4: -1574.8,-1496.06 -1368.11,-1368.11

## Silkscreen, mask and mechanical layers (free items; w line width, h text height)
Top Overlay:
  lines w7.87: -1564.96,-1574.8 -1564.96,-1043.31 2263.78,-1043.31 2263.78,-1574.8 ; -1564.96,1574.8 -1564.96,1043.31 2263.78,1043.31 ; -2362.2,-1574.8 2362.2,-1574.8 2362.2,1574.8 -2362.2,1574.8 -2362.2,-1574.8

## Text inside footprints (layer, text, board x,y; h text height)
J3: Top Overlay "9" at -2074.61,-594.09 h47.24 r270; Top Overlay "6" at -2074.61,-1066.34 h47.24 r270; Top Overlay "5" at -1958.86,-551.97 h47.24 r270; Top Overlay "1" at -1961.81,-1116.34 h47.24 r270; Mechanical 14 "1" at -1954.72,-1194.88 h47.24 r270; Mechanical 14 "5" at -1954.72,-471.46 h47.24 r270; Mechanical 14 "6" at -2074.8,-1182.09 h47.24 r270; Mechanical 14 "9" at -2073.82,-472.44 h47.24 r270; Mechanical 14 "9 D-Sub Female" at -1818.03,-603.23 h47.24 r270